# EAGLE board adapter2 (EAGLE 6.5.0)
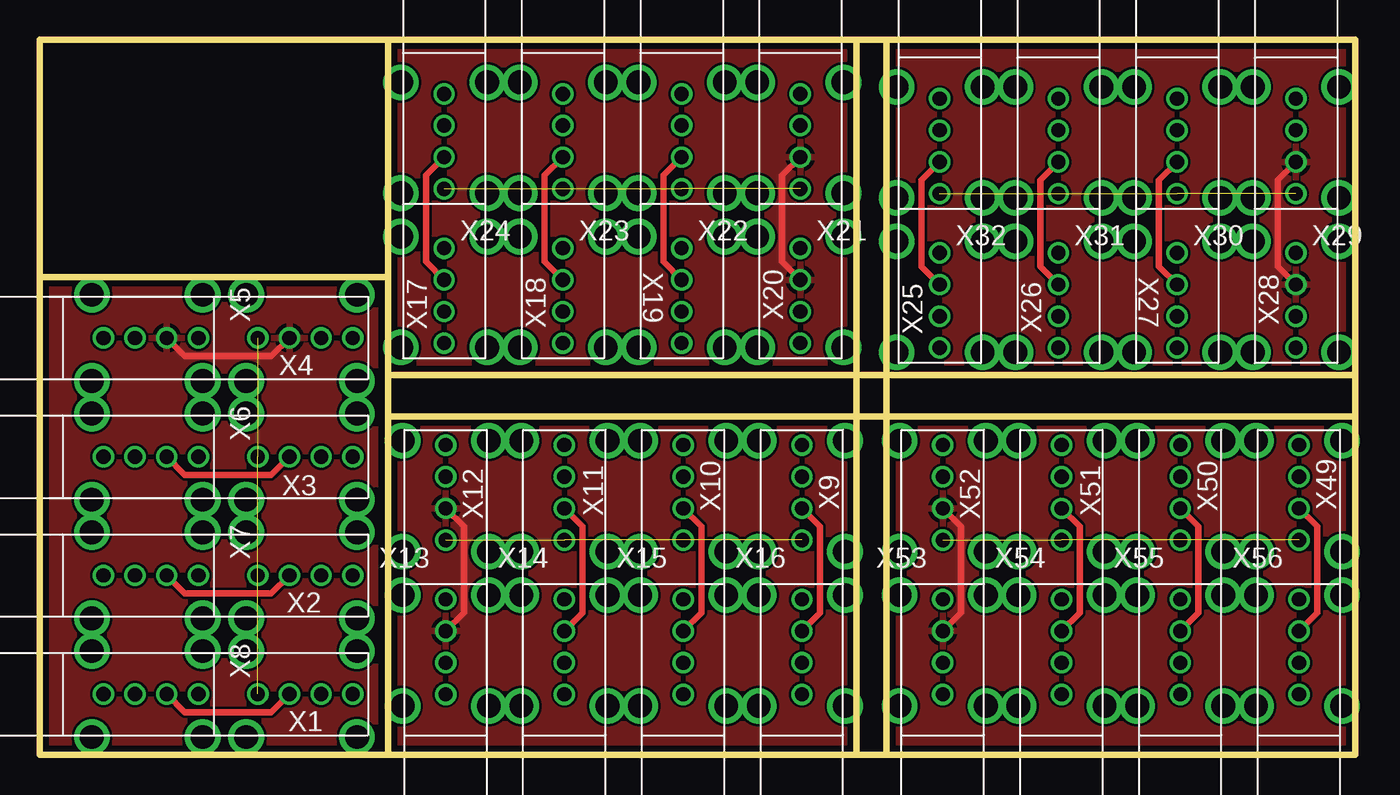
[diagram p0: board, top side]
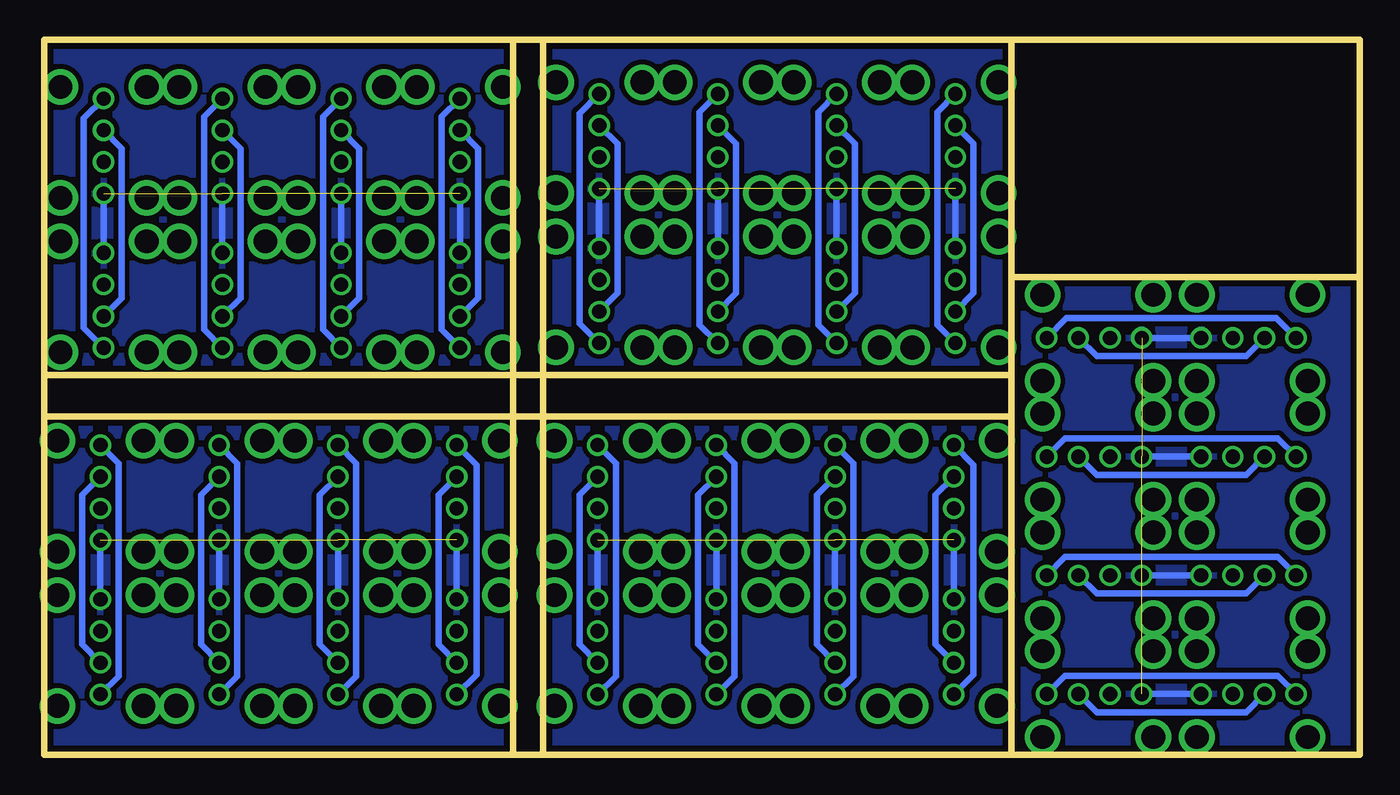
[diagram p1: board, bottom side, seen from below]

Size 83.1 x 45.2 mm. Coordinates in mm from the lower left corner, seen from the top.
Outline: 53.5,0 0,0 0,30.2
Outline: 53.5,0 83.1,0 83.1,21.4
Outline: 83.1,21.4 83.1,24
Outline: 83.1,24 83.1,45.2 53.5,45.2
Outline: 22,30.2 0,30.2
Outline: 22,0.1 22,21.4
Outline: 22,21.4 22,24
Outline: 22,24 22,30.2
Outline: 22,45.2 51.6,45.2
Outline: 51.6,45.2 53.5,45.2
Outline: 51.6,0.1 51.6,45.2
Outline: 53.5,0 53.5,45.2
Outline: 22,45.2 22,30.2
Outline: 22,21.4 83.1,21.4
Outline: 83.1,24 22,24
Outline: 22,45.2 0,45.2 0,30.2
Copper layers (1*16): Top 0.0356mm / dielectric 1.5011mm / Bottom 0.0356mm
Design rules "LaenPCBOrder": minimum track width 6mil, minimum drill 13mil, track to track 6mil, track to pad 6mil, pad to pad 6mil, via to via 6mil, smd to smd 6mil, copper to edge 15mil, drill to drill 6mil, minimum pad ring 7mil, minimum via ring 7mil, stop-mask expansion 3mil, vias tented up to drill 0mil, thermal gap 10mil

## Footprints (pad centres in the part's own frame; a part is rotated, then mirrored left to right if it is on the bottom)
USB-A-HU = drill 0.9: D+ 2.73,0; D- 4.73,0; GND 0.73,0; VBUS 6.73,0 | drill 1.5: P$5 0,2.72; P$6 0,-2.72; P$7 7,2.72; P$8 7,-2.72

## Placement (x,y rotation side)
X1  USB-A-HU  [USB-A-HU]  13.05,3.85 0 top
X2  USB-A-HU  [USB-A-HU]  13.05,11.35 0 top
X3  USB-A-HU  [USB-A-HU]  13.05,18.85 0 top
X4  USB-A-HU  [USB-A-HU]  13.05,26.35 0 top
X5  USB-A-HU  [USB-A-HU]  3.3,26.35 0 top
X6  USB-A-HU  [USB-A-HU]  3.3,18.85 0 top
X7  USB-A-HU  [USB-A-HU]  3.3,11.35 0 top
X8  USB-A-HU  [USB-A-HU]  3.3,3.85 0 top
X9  USB-A-HU  [USB-A-HU]  48.15,12.85 90 top
X10  USB-A-HU  [USB-A-HU]  40.65,12.85 90 top
X11  USB-A-HU  [USB-A-HU]  33.15,12.85 90 top
X12  USB-A-HU  [USB-A-HU]  25.65,12.85 90 top
X13  USB-A-HU  [USB-A-HU]  25.65,3.1 90 top
X14  USB-A-HU  [USB-A-HU]  33.15,3.1 90 top
X15  USB-A-HU  [USB-A-HU]  40.65,3.1 90 top
X16  USB-A-HU  [USB-A-HU]  48.15,3.1 90 top
X17  USB-A-HU  [USB-A-HU]  25.55,32.75 270 top
X18  USB-A-HU  [USB-A-HU]  33.05,32.75 270 top
X19  USB-A-HU  [USB-A-HU]  40.55,32.75 270 top
X20  USB-A-HU  [USB-A-HU]  48.05,32.75 270 top
X21  USB-A-HU  [USB-A-HU]  48.05,42.5 270 top
X22  USB-A-HU  [USB-A-HU]  40.55,42.5 270 top
X23  USB-A-HU  [USB-A-HU]  33.05,42.5 270 top
X24  USB-A-HU  [USB-A-HU]  25.55,42.5 270 top
X25  USB-A-HU  [USB-A-HU]  56.85,32.45 270 top
X26  USB-A-HU  [USB-A-HU]  64.35,32.45 270 top
X27  USB-A-HU  [USB-A-HU]  71.85,32.45 270 top
X28  USB-A-HU  [USB-A-HU]  79.35,32.45 270 top
X29  USB-A-HU  [USB-A-HU]  79.35,42.2 270 top
X30  USB-A-HU  [USB-A-HU]  71.85,42.2 270 top
X31  USB-A-HU  [USB-A-HU]  64.35,42.2 270 top
X32  USB-A-HU  [USB-A-HU]  56.85,42.2 270 top
X49  USB-A-HU  [USB-A-HU]  79.55,12.85 90 top
X50  USB-A-HU  [USB-A-HU]  72.05,12.85 90 top
X51  USB-A-HU  [USB-A-HU]  64.55,12.85 90 top
X52  USB-A-HU  [USB-A-HU]  57.05,12.85 90 top
X53  USB-A-HU  [USB-A-HU]  57.05,3.1 90 top
X54  USB-A-HU  [USB-A-HU]  64.55,3.1 90 top
X55  USB-A-HU  [USB-A-HU]  72.05,3.1 90 top
X56  USB-A-HU  [USB-A-HU]  79.55,3.1 90 top

## Library data of the parts
X1-X32 X49-X56 = con-usb

## Nets
DM1: X4.D- X5.D+
DM2: X12.D- X13.D+
DM3: X20.D- X21.D+
DM4: X28.D- X29.D+
DM7: X52.D- X53.D+
DP1: X4.D+ X5.D-
DP2: X12.D+ X13.D-
DP3: X20.D+ X21.D-
DP4: X28.D+ X29.D-
DP7: X52.D+ X53.D-
GND: X1.GND X2.GND X3.GND X4.GND X5.VBUS X6.VBUS X7.VBUS X8.VBUS
GND1: X17.GND X18.GND X19.GND X20.GND X21.VBUS X22.VBUS X23.VBUS X24.VBUS
GND4: X9.GND X10.GND X11.GND X12.GND X13.VBUS X14.VBUS X15.VBUS X16.VBUS
GND7: X49.GND X50.GND X51.GND X52.GND X53.VBUS X54.VBUS X55.VBUS X56.VBUS
GND10: X25.GND X26.GND X27.GND X28.GND X29.VBUS X30.VBUS X31.VBUS X32.VBUS
N$1: X1.VBUS X8.GND
N$2: X10.VBUS X15.GND
N$3: X3.D+ X6.D-
N$4: X3.D- X6.D+
N$5: X11.VBUS X14.GND
N$6: X2.D+ X7.D-
N$7: X2.D- X7.D+
N$8: X12.VBUS X13.GND
N$9: X1.D+ X8.D-
N$10: X2.VBUS X7.GND
N$11: X3.VBUS X6.GND
N$12: X4.VBUS X5.GND
N$13: X1.D- X8.D+
N$14: X9.VBUS X16.GND
N$15: X11.D+ X14.D-
N$16: X11.D- X14.D+
N$17: X10.D+ X15.D-
N$18: X10.D- X15.D+
N$19: X9.D+ X16.D-
N$20: X9.D- X16.D+
N$21: X18.VBUS X23.GND
N$22: X19.VBUS X22.GND
N$23: X20.VBUS X21.GND
N$24: X17.VBUS X24.GND
N$25: X19.D+ X22.D-
N$26: X19.D- X22.D+
N$27: X18.D+ X23.D-
N$28: X18.D- X23.D+
N$29: X17.D+ X24.D-
N$30: X17.D- X24.D+
N$31: X26.VBUS X31.GND
N$32: X27.VBUS X30.GND
N$33: X28.VBUS X29.GND
N$34: X25.VBUS X32.GND
N$35: X27.D+ X30.D-
N$36: X27.D- X30.D+
N$37: X26.D+ X31.D-
N$38: X26.D- X31.D+
N$39: X25.D+ X32.D-
N$40: X25.D- X32.D+
N$61: X50.VBUS X55.GND
N$62: X51.VBUS X54.GND
N$63: X52.VBUS X53.GND
N$64: X49.VBUS X56.GND
N$65: X51.D+ X54.D-
N$66: X51.D- X54.D+
N$67: X50.D+ X55.D-
N$68: X50.D- X55.D+
N$69: X49.D+ X56.D-
N$70: X49.D- X56.D+

## Tracks (layer width: path | path; a pad name or v marks a point on that pad's centre or on a via)
DM1
  Bottom 0.406: X4.D- 16.63,25.2 7.18,25.2 X5.D+
DM2
  Bottom 0.406: X12.D- 26.8,16.43 26.8,6.98 X13.D+
DM3
  Bottom 0.406: X20.D- 46.9,29.17 46.9,38.62 X21.D+
DM4
  Bottom 0.406: X28.D- 78.2,28.87 78.2,38.32 X29.D+
DM7
  Bottom 0.406: X52.D- 58.2,16.43 58.2,6.98 X53.D+
DP1
  Top 0.406: X5.D- 9.18,25.2 14.63,25.2 X4.D+
  pour Top: 0.6,29.7 0.6,0.6 21.2,0.6 21.2,29.7
DP2
  Top 0.406: X13.D- 26.8,8.98 26.8,14.43 X12.D+
  pour Top: 22.3,0.4 51.4,0.4 51.4,21 22.3,21 22.3,0.5
DP3
  Top 0.406: X21.D- 46.9,36.62 46.9,31.17 X20.D+
  pour Top: 51.4,45.2 22.3,45.2 22.3,24.6 51.4,24.6
DP4
  Top 0.406: X29.D- 78.2,36.32 78.2,30.87 X28.D+
  pour Top: 82.7,44.9 53.6,44.9 53.6,24.3 82.7,24.3 82.7,44.8
DP7
  Top 0.406: X53.D- 58.2,8.98 58.2,14.43 X52.D+
  pour Top: 53.7,0.4 82.8,0.4 82.8,21 53.7,21 53.7,0.5
GND  (3 unrouted)
  Bottom 0.406: X4.GND X5.VBUS | X3.GND X6.VBUS | X2.GND X7.VBUS | X1.GND X8.VBUS
  pour Bottom (isolate 0.305): 0.5,29.7 0.5,0.6 21.3,0.6 21.3,29.7
GND1  (3 unrouted)
  Bottom 0.406: X20.GND X21.VBUS | X19.GND X22.VBUS | X18.GND X23.VBUS | X17.GND X24.VBUS
  pour Bottom (isolate 0.305): 51.4,45.3 22.3,45.3 22.3,24.5 51.4,24.5
GND4  (3 unrouted)
  Bottom 0.406: X12.GND X13.VBUS | X11.GND X14.VBUS | X10.GND X15.VBUS | X9.GND X16.VBUS
  pour Bottom (isolate 0.305): 22.3,0.3 51.4,0.3 51.4,21.1 22.3,21.1
GND7  (3 unrouted)
  Bottom 0.406: X52.GND X53.VBUS | X51.GND X54.VBUS | X50.GND X55.VBUS | X49.GND X56.VBUS
  pour Bottom (isolate 0.305): 53.7,0.3 82.8,0.3 82.8,21.1 53.7,21.1
GND10  (3 unrouted)
  Bottom 0.406: X28.GND X29.VBUS | X27.GND X30.VBUS | X26.GND X31.VBUS | X25.GND X32.VBUS
  pour Bottom (isolate 0.305): 82.7,45 53.6,45 53.6,24.2 82.7,24.2
N$1
  Bottom 0.406: X8.GND 5.18,5 18.63,5 X1.VBUS
N$2
  Bottom 0.406: X15.GND 39.5,4.98 39.5,18.43 X10.VBUS
N$3
  Top 0.406: X6.D- 9.18,17.7 14.63,17.7 X3.D+
N$4
  Bottom 0.406: X6.D+ 7.18,17.7 16.63,17.7 X3.D-
N$5
  Bottom 0.406: X11.VBUS 32,18.43 32,4.98 X14.GND
N$6
  Top 0.406: X7.D- 9.18,10.2 14.63,10.2 X2.D+
N$7
  Bottom 0.406: X2.D- 16.63,10.2 7.18,10.2 X7.D+
N$8
  Bottom 0.406: X12.VBUS 24.4,18.33 24.4,5.08 X13.GND
N$9
  Top 0.406: X8.D- 9.18,2.7 14.63,2.7 X1.D+
N$10
  Bottom 0.406: X7.GND 5.18,12.5 18.63,12.5 X2.VBUS
N$11
  Bottom 0.406: X3.VBUS 18.63,20 5.18,20 X6.GND
N$12
  Bottom 0.406: X4.VBUS 18.53,27.6 5.28,27.6 X5.GND
N$13
  Bottom 0.406: X1.D- 16.63,2.7 7.18,2.7 X8.D+
N$14
  Bottom 0.406: X16.GND 47,4.98 47,18.43 X9.VBUS
N$15
  Top 0.406: X14.D- 34.3,8.98 34.3,14.43 X11.D+
N$16
  Bottom 0.406: X14.D+ 34.3,6.98 34.3,16.43 X11.D-
N$17
  Top 0.406: X15.D- 41.8,8.98 41.8,14.43 X10.D+
N$18
  Bottom 0.406: X10.D- 41.8,16.43 41.8,6.98 X15.D+
N$19
  Top 0.406: X16.D- 49.3,8.98 49.3,14.43 X9.D+
N$20
  Bottom 0.406: X9.D- 49.3,16.43 49.3,6.98 X16.D+
N$21
  Bottom 0.406: X23.GND 34.2,40.62 34.2,27.17 X18.VBUS
N$22
  Bottom 0.406: X19.VBUS 41.7,27.17 41.7,40.62 X22.GND
N$23
  Bottom 0.406: X20.VBUS 49.3,27.27 49.3,40.52 X21.GND
N$24
  Bottom 0.406: X24.GND 26.7,40.62 26.7,27.17 X17.VBUS
N$25
  Top 0.406: X22.D- 39.4,36.62 39.4,31.17 X19.D+
N$26
  Bottom 0.406: X22.D+ 39.4,38.62 39.4,29.17 X19.D-
N$27
  Top 0.406: X23.D- 31.9,36.62 31.9,31.17 X18.D+
N$28
  Bottom 0.406: X18.D- 31.9,29.17 31.9,38.62 X23.D+
N$29
  Top 0.406: X24.D- 24.4,36.62 24.4,31.17 X17.D+
N$30
  Bottom 0.406: X17.D- 24.4,29.17 24.4,38.62 X24.D+
N$31
  Bottom 0.406: X31.GND 65.5,40.32 65.5,26.87 X26.VBUS
N$32
  Bottom 0.406: X27.VBUS 73,26.87 73,40.32 X30.GND
N$33
  Bottom 0.406: X28.VBUS 80.6,26.97 80.6,40.22 X29.GND
N$34
  Bottom 0.406: X32.GND 58,40.32 58,26.87 X25.VBUS
N$35
  Top 0.406: X30.D- 70.7,36.32 70.7,30.87 X27.D+
N$36
  Bottom 0.406: X30.D+ 70.7,38.32 70.7,28.87 X27.D-
N$37
  Top 0.406: X31.D- 63.2,36.32 63.2,30.87 X26.D+
N$38
  Bottom 0.406: X26.D- 63.2,28.87 63.2,38.32 X31.D+
N$39
  Top 0.406: X32.D- 55.7,36.32 55.7,30.87 X25.D+
N$40
  Bottom 0.406: X25.D- 55.7,28.87 55.7,38.32 X32.D+
N$61
  Bottom 0.406: X55.GND 70.9,4.98 70.9,18.43 X50.VBUS
N$62
  Bottom 0.406: X51.VBUS 63.4,18.43 63.4,4.98 X54.GND
N$63
  Bottom 0.406: X52.VBUS 55.8,18.33 55.8,5.08 X53.GND
N$64
  Bottom 0.406: X56.GND 78.4,4.98 78.4,18.43 X49.VBUS
N$65
  Top 0.406: X54.D- 65.7,8.98 65.7,14.43 X51.D+
N$66
  Bottom 0.406: X54.D+ 65.7,6.98 65.7,16.43 X51.D-
N$67
  Top 0.406: X55.D- 73.2,8.98 73.2,14.43 X50.D+
N$68
  Bottom 0.406: X50.D- 73.2,16.43 73.2,6.98 X55.D+
N$69
  Top 0.406: X56.D- 80.7,8.98 80.7,14.43 X49.D+
N$70
  Bottom 0.406: X49.D- 80.7,16.43 80.7,6.98 X56.D+